# Altium PCB bt-kbd-v3a.PcbDoc
Units mm, origin at the board's own origin, x right, y up, seen from the top; angles counter-clockwise.
Board outline 62.3 x 51.2 mm, 2 copper layers (Top Layer, Bottom Layer), stack 0.98 mm thick; 57 components, 19 nets, 371 pads, 80 vias.
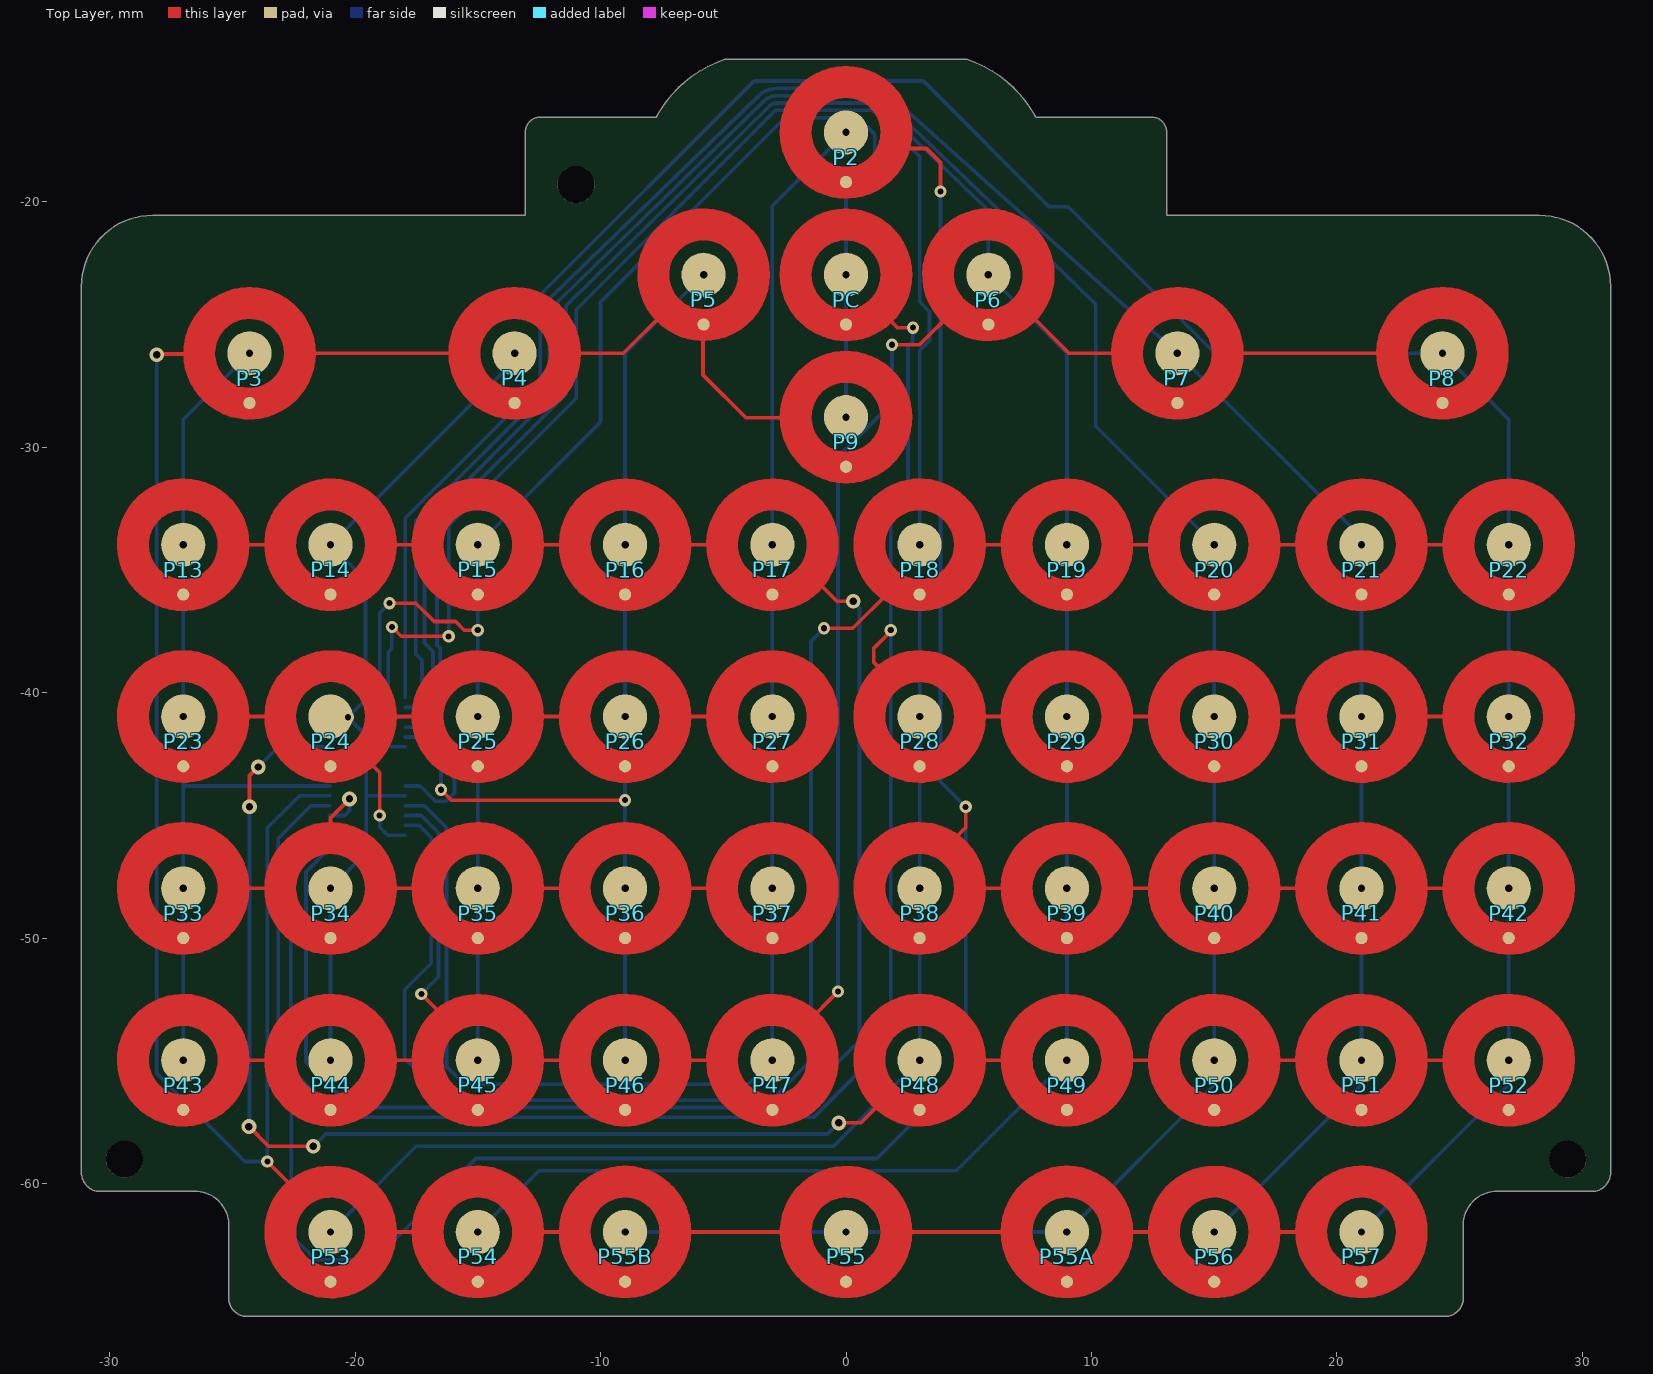
[diagram p0: Top Layer view]
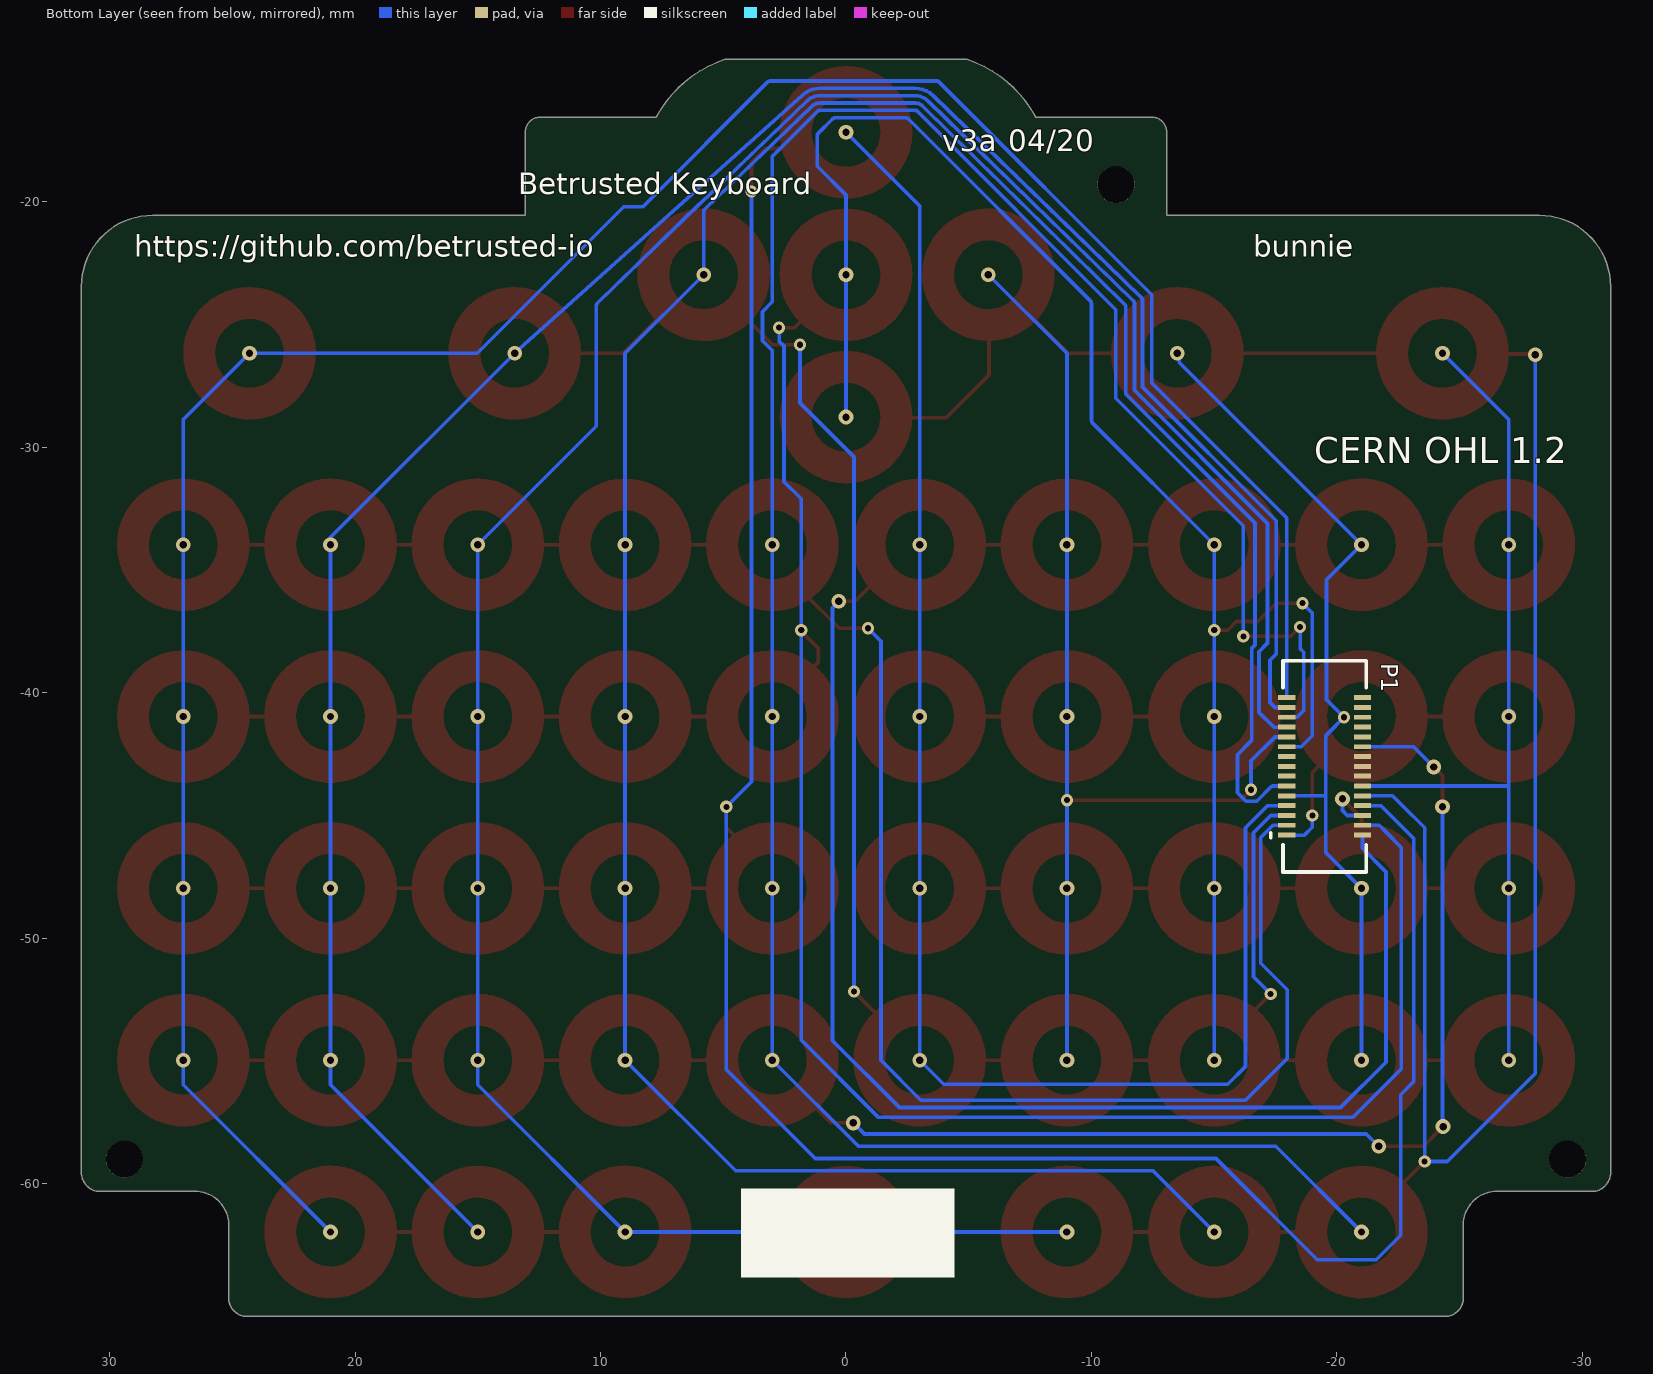
[diagram p1: Bottom Layer view, seen from below]

## Layer stack, top to bottom
Top Solder: solder mask 0.01, Solder Resist, Dk 3.5
Top Layer: signal copper 0.035
Dielectric 1: core 0.91, Core-042, Dk 4.6
Bottom Layer: signal copper 0.035
Bottom Solder: solder mask 0.01, Solder Resist, Dk 3.5

## Board outline
-26.55,-60.3 cw(c-26.55,-61.709) -25.15,-61.55 -25.15,-64.65 ccw(c-24.381,-64.65) -24.55,-65.4 24.55,-65.4 ccw(c24.381,-64.65) 25.15,-64.65 25.15,-61.55 cw(c26.55,-61.709) 26.55,-60.3 30.55,-60.3 ccw(c30.381,-59.55) 31.15,-59.55 31.15,-23.45 ccw(c28.25,-23.45) 28.25,-20.55 13.061,-20.55 13.061,-17.15 ccw(c12.461,-17.15) 12.461,-16.55 7.727,-16.55 ccw(c3.4,-18.85) 4.937,-14.197 -4.937,-14.197 ccw(c-3.4,-18.85) -7.727,-16.55 -12.461,-16.55 ccw(c-12.461,-17.15) -13.061,-17.15 -13.061,-20.55 -28.25,-20.55 ccw(c-28.25,-23.45) -31.15,-23.45 -31.15,-59.55 ccw(c-30.381,-59.55) -30.55,-60.3

## Design rules (kind name [scope] priority, off if disabled: settings)
Clearance [All] p1: gap=0.15 ignorepadtopadclearanceinfootprint=FALSE
MinimumSolderMaskSliver [All] p1 off: minsoldermaskwidth=0.254
PolygonConnect [All] p1: connectstyle=Relief reliefconductorwidth=0.254 reliefentries=4 polygonreliefangle="90 Angle" airgapwidth=0.254
RoomDefinition kbd [InComponentClass('kbd')] p1 off: confinementstyle=ConfineIn formatcopy=TRUE lockcomponents=FALSE outline 31.498,-61.146 36.098,-61.146 36.098,-49.446 31.498,-49.446
RoutingVias [All] p1: holewidth=0.4 width=0.8 viastyle="Through Hole" minholewidth=0.25 minwidth=0.5 maxholewidth=0.4 maxwidth=0.8
SilkToSilkClearance [All] p1 off: silktosilkclearance=0.254
SilkToSolderMaskClearance [IsPad] p1 off: minsilkscreentomaskgap=0.254 clearancetoexposedcopper=TRUE
SolderMaskExpansion [All] p1 off: expansion=0.102 istentingtop=FALSE
Width [All] p1: maxlimit=5 minlimit=0.15 preferedwidth=0.2
27 further rules are at their usual default settings.

## Components (designator, comment, footprint, x,y, rotation, side; value= is the part's Value field where it differs from the comment)
P1 "DF40HC(3.0)-30DS-0.4V(51)" HRS_DF40HC(3.0)-30DS-0.4V(51) -19.5,-43 r270 bottom
P2 "4mm Dome" 4MM_DOME_SW#1 0,-17.17 r0 top
P3 "4mm Dome" 4MM_DOME_SW#1 -24.3,-26.17 r0 top
P4 "4mm Dome" 4MM_DOME_SW#2 -13.5,-26.17 r0 top
P5 "4mm Dome" 4MM_DOME_SW#1 -5.8,-22.97 r0 top
P6 "4mm Dome" 4MM_DOME_SW#2 5.8,-22.97 r0 top
P7 "4mm Dome" 4MM_DOME_SW#1 13.5,-26.17 r0 top
P8 "4mm Dome" 4MM_DOME_SW#3 24.3,-26.17 r0 top
P9 "4mm Dome" 4MM_DOME_SW#1 0,-28.77 r0 top
P13 "4mm Dome" 4MM_DOME_SW#3 -27,-33.97 r0 top
P14 "4mm Dome" 4MM_DOME_SW#2 -21,-33.97 r0 top
P15 "4mm Dome" 4MM_DOME_SW#2 -15,-33.97 r0 top
P16 "4mm Dome" 4MM_DOME_SW#1 -9,-33.97 r0 top
P17 "4mm Dome" 4MM_DOME_SW#2 -3,-33.97 r0 top
P18 "4mm Dome" 4MM_DOME_SW#4 3,-33.97 r0 top
P19 "4mm Dome" 4MM_DOME_SW#1 9,-33.97 r0 top
P20 "4mm Dome" 4MM_DOME_SW#1 15,-33.97 r0 top
P21 "4mm Dome" 4MM_DOME_SW#1 21,-33.97 r0 top
P22 "4mm Dome" 4MM_DOME_SW#3 27,-33.97 r0 top
P23 "4mm Dome" 4MM_DOME_SW#3 -27,-40.97 r0 top
P24 "4mm Dome" 4MM_DOME_SW#2 -21,-40.97 r0 top
P25 "4mm Dome" 4MM_DOME_SW#2 -15,-40.97 r0 top
P26 "4mm Dome" 4MM_DOME_SW#1 -9,-40.97 r0 top
P27 "4mm Dome" 4MM_DOME_SW#1 -3,-40.97 r0 top
P28 "4mm Dome" 4MM_DOME_SW#1 3,-40.97 r0 top
P29 "4mm Dome" 4MM_DOME_SW#2 9,-40.97 r0 top
P30 "4mm Dome" 4MM_DOME_SW#2 15,-40.97 r0 top
P31 "4mm Dome" 4MM_DOME_SW#1 21,-40.97 r0 top
P32 "4mm Dome" 4MM_DOME_SW#1 27,-40.97 r0 top
P33 "4mm Dome" 4MM_DOME_SW#3 -27,-47.97 r0 top
P34 "4mm Dome" 4MM_DOME_SW#4 -21,-47.97 r0 top
P35 "4mm Dome" 4MM_DOME_SW#1 -15,-47.97 r0 top
P36 "4mm Dome" 4MM_DOME_SW#1 -9,-47.97 r0 top
P37 "4mm Dome" 4MM_DOME_SW#3 -3,-47.97 r0 top
P38 "4mm Dome" 4MM_DOME_SW#1 3,-47.97 r0 top
P39 "4mm Dome" 4MM_DOME_SW#1 9,-47.97 r0 top
P40 "4mm Dome" 4MM_DOME_SW#1 15,-47.97 r0 top
P41 "4mm Dome" 4MM_DOME_SW#1 21,-47.97 r0 top
P42 "4mm Dome" 4MM_DOME_SW#2 27,-47.97 r0 top
P43 "4mm Dome" 4MM_DOME_SW#3 -27,-54.97 r0 top
P44 "4mm Dome" 4MM_DOME_SW#2 -21,-54.97 r0 top
P45 "4mm Dome" 4MM_DOME_SW#2 -15,-54.97 r0 top
P46 "4mm Dome" 4MM_DOME_SW#2 -9,-54.97 r0 top
P47 "4mm Dome" 4MM_DOME_SW#1 -3,-54.97 r0 top
P48 "4mm Dome" 4MM_DOME_SW#1 3,-54.97 r0 top
P49 "4mm Dome" 4MM_DOME_SW#1 9,-54.97 r0 top
P50 "4mm Dome" 4MM_DOME_SW#1 15,-54.97 r0 top
P51 "4mm Dome" 4MM_DOME_SW#1 21,-54.97 r0 top
P52 "4mm Dome" 4MM_DOME_SW#1 27,-54.97 r0 top
P53 "4mm Dome" 4MM_DOME_SW#2 -21,-61.97 r0 top
P54 "4mm Dome" 4MM_DOME_SW#2 -15,-61.97 r0 top
P55 "4mm Dome" 4MM_DOME_SW#5 0,-61.97 r0 top
P55A "4mm Dome" 4MM_DOME_SW#2 9,-61.97 r0 top
P55B "4mm Dome" 4MM_DOME_SW#1 -9,-61.97 r0 top
P56 "4mm Dome" 4MM_DOME_SW#2 15,-61.97 r0 top
P57 "4mm Dome" 4MM_DOME_SW#3 21,-61.97 r0 top
PC "4mm Dome" 4MM_DOME_SW#2 0,-22.97 r0 top

## Footprints (in the part's own frame and the unit in brackets; to place one, negate y for a bottom-side part, rotate by r counter-clockwise, add the part's x,y. Pads: shape width x height; smd on the part's side, far side on the other; paste and mask are expansions set on the pad)
4MM_DOME_SW#1 [mm] "4mm diameter dome switch footprint"
  round 1.8 smd mask+2.1: 1(0,0)
  round 0.5 smd: 2(0,-2.025)
  Top Layer lines w1.3: -2.031,-0.277 ccw(c0,0) 1.718,-1.118 ccw(c0,0) 2.05,0 ccw(c0,0) -2.031,-0.277
  body extent -2,-2 2,2, height 0.3
4MM_DOME_SW#2 [mm] "4mm diameter dome switch footprint"
  round 1.8 smd mask+2.1: 1(0,0)
  round 0.5 smd: 2(0,-2.025)
  Top Layer lines w1.3: -2.05,0 cw(c0,0) 2.05,0 cw(c0,0) 0.319,-2.025 cw(c0,0) -0.319,-2.025 cw(c0,0) -2.05,0
  body extent -2,-2 2,2, height 0.3
4MM_DOME_SW#3 [mm] "4mm diameter dome switch footprint"
  round 1.8 smd mask+2.1: 1(0,0)
  round 0.5 smd: 2(0,-2.025)
  Top Layer lines w1.3: -0.319,-2.025 cw(c0,0) 2.05,0 cw(c0,0) -0.319,-2.025
  body extent -2,-2 2,2, height 0.3
4MM_DOME_SW#4 [mm] "4mm diameter dome switch footprint"
  round 1.8 smd mask+2.1: 1(0,0)
  round 0.5 smd: 2(0,-2.025)
  Top Layer lines w1.3: -1.592,1.292 ccw(c0,0) -1.269,-1.61 ccw(c0,0) -0.319,-2.025 ccw(c0,0) 0.319,-2.025 ccw(c0,0) 2.05,0 ccw(c0,0) -1.592,1.292
  body extent -2,-2 2,2, height 0.3
4MM_DOME_SW#5 [mm] "4mm diameter dome switch footprint"
  round 1.8 smd mask+2.1: 1(0,0)
  round 0.5 smd: 2(0,-2.025)
  Top Layer lines w1.3: -2.05,0 cw(c0,0) -2.048,0.098 cw(c0,0) -0.534,1.979 cw(c0,0) 2.05,0 cw(c0,0) 0.319,-2.025 cw(c0,0) -0.319,-2.025 cw(c0,0) -2.05,0
  body extent -2,-2 2,2, height 0.3
HRS_DF40HC(3.0)-30DS-0.4V(51) [mm] "0.4mm Pitch, Board to Board Connector, 3.0mm mated height"
  rect 0.2x0.7 smd mask+0.06: 1(2.8,-1.54) 2(2.4,-1.54) 3(2,-1.54) 4(1.6,-1.54) 5(1.2,-1.54) 6(0.8,-1.54) 7(0.4,-1.54) 8(0,-1.54) 9(-0.4,-1.54) 10(-0.8,-1.54) 11(-1.2,-1.54) 12(-1.6,-1.54) 13(-2,-1.54) 14(-2.4,-1.54) 15(-2.8,-1.54) 16(2.8,1.54) 17(2.4,1.54) 18(2,1.54) 19(1.6,1.54) 20(1.2,1.54) 21(0.8,1.54) 22(0.4,1.54) 23(0,1.54) 24(-0.4,1.54) 25(-0.8,1.54) 26(-1.2,1.54) 27(-1.6,1.54) 28(-2,1.54) 29(-2.4,1.54) 30(-2.8,1.54)
  silkscreen extent -4.3,-2.2 4.3,1.7, body extent -4.3,-1.69 4.3,1.69, height 2.89

## Part data
P1: library part "Header 15X2A", "Header, 15-Pin, Dual row", LatestRevisionDate=17-Jul-2002, LatestRevisionNote="Re-released for DXP Platform.", MPN=DF40HC(3.0)-30DS-0.4V(51), MYPN=J-DF40HC(3.0)-30DS-0.4V(51), Publisher="Altium Limited", System=Connector, VENDOR=Hirose
P2 P3 P4 P5 P6 P7 P8 P9 P13 P14 P15 P16 P17 P18 P19 P20 P21 P22 P23 P24 P25 P26 P27 P28 P29 P30 P31 P32 P33 P34 P35 P36 P37 P38 P39 P40 P41 P42 P43 P44 P45 P46 P47 P48 P49 P50 P51 P52 P53 P54 P55 P55A P55B P56 P57 PC: library part "Header 2", "Header, 2-Pin", LatestRevisionDate=17-Jul-2002, LatestRevisionNote="Re-released for DXP Platform.", Publisher="Altium Limited"

## Free pads (board coordinates)
  round 1.5 hole 1.5 unplated mask+0.5: 0(-29.4,-59) 0(-11,-19.3) 0(29.4,-59)
  rect 2.489x0.051 on Bottom Overlay: 1(-26.618,-26.192) 1(-26.618,-26.141) 1(-26.618,-26.243) 1(-24.332,-23.855)
  rect 2.54x0.051 on Bottom Overlay: 1(-26.593,-26.497) 1(-26.593,-26.395) 1(-26.593,-26.344) 1(-26.593,-26.294) 1(-26.593,-26.09) 1(-26.593,-25.989) 1(-26.593,-25.938) 1(-26.593,-26.446) 1(-26.593,-26.04) 1(-26.593,-25.887) 1(-26.491,-25.684) 1(-22.173,-25.684) 1(-22.072,-26.446) 1(-22.072,-26.395) 1(-22.072,-26.344) 1(-22.072,-26.294) 1(-22.072,-26.243) 1(-22.072,-26.192) 1(-22.072,-26.141) 1(-22.072,-26.09) 1(-22.072,-26.04) 1(-22.072,-25.989) 1(-22.072,-25.938) 1(-22.072,-25.887)
  rect 2.591x0.051 on Bottom Overlay: 1(-26.568,-26.598) 1(-26.568,-26.548) 1(-26.568,-25.836) 1(-26.568,-25.786) 1(-26.568,-25.735) 1(-26.517,-26.649) 1(-22.148,-26.649) 1(-22.097,-26.548) 1(-22.097,-26.497) 1(-22.097,-25.786) 1(-22.097,-26.598) 1(-22.097,-25.836)
  rect 0.102x0.051 on Bottom Overlay: 1(-26.491,-23.398) 1(-25.425,-28.63) 1(-23.24,-28.63) 1(-22.173,-23.398)
  rect 0.254x0.051 on Bottom Overlay: 1(-26.466,-28.884) 1(-26.466,-23.449) 1(-25.45,-28.58) 1(-23.215,-28.58) 1(-22.199,-28.884) 1(-22.199,-23.449)
  rect 0.356x0.051 on Bottom Overlay: 1(-26.466,-28.834) 1(-26.466,-23.5) 1(-25.501,-28.529) 1(-23.164,-28.529) 1(-22.199,-23.5)
  rect 0.152x0.051 on Bottom Overlay: 1(-26.466,-28.935) 1(-22.199,-28.935)
  rect 0.457x0.051 on Bottom Overlay: 1(-26.466,-23.55)
  rect 0.508x0.051 on Bottom Overlay: 1(-26.441,-28.783) 1(-22.224,-28.783) 1(-22.224,-23.55)
  rect 0.61x0.051 on Bottom Overlay: 1(-26.441,-28.732) 1(-26.441,-23.601) 1(-22.224,-23.601)
  rect 0.711x0.051 on Bottom Overlay: 1(-26.441,-23.652)
  rect 0.864x0.051 on Bottom Overlay: 1(-26.415,-28.63) 1(-26.415,-23.703) 1(-24.332,-22.636) 1(-22.25,-28.63) 1(-22.25,-23.703)
  rect 0.965x0.051 on Bottom Overlay: 1(-26.415,-23.754) 1(-24.332,-22.788) 1(-24.332,-22.738) 1(-24.332,-22.687) 1(-22.25,-23.754)
  rect 0.762x0.051 on Bottom Overlay: 1(-26.415,-28.681) 1(-22.25,-28.681) 1(-22.25,-23.652)
  rect 1.016x0.051 on Bottom Overlay: 1(-26.39,-28.58) 1(-24.358,-22.839) 1(-22.275,-28.58)
  rect 2.337x0.051 on Bottom Overlay: 1(-26.39,-26.7) 1(-25.628,-25.176) 1(-22.275,-26.7)
  rect 1.219x0.051 on Bottom Overlay: 1(-26.39,-23.855) 1(-24.358,-23.398) 1(-22.275,-23.855)
  rect 1.118x0.051 on Bottom Overlay: 1(-26.39,-23.804) 1(-26.39,-28.529) 1(-24.358,-23.144) 1(-22.275,-28.529) 1(-22.275,-23.804)
  rect 2.286x0.051 on Bottom Overlay: 1(-26.364,-25.633) 1(-23.062,-25.176) 1(-22.351,-25.633)
  rect 2.134x0.051 on Bottom Overlay: 1(-26.237,-26.751) 1(-25.729,-25.227) 1(-22.935,-25.227) 1(-22.427,-26.751)
  rect 1.829x0.051 on Bottom Overlay: 1(-26.187,-28.376) 1(-26.085,-28.122) 1(-26.034,-28.021) 1(-26.034,-26.852) 1(-26.034,-25.532) 1(-25.983,-26.903) 1(-25.983,-25.481) 1(-25.78,-27.462) 1(-25.78,-27.411) 1(-22.885,-27.462) 1(-22.885,-27.411) 1(-22.732,-25.43) 1(-22.681,-27.97) 1(-22.681,-26.903) 1(-22.681,-26.852) 1(-22.681,-25.481) 1(-22.631,-28.072) 1(-22.631,-28.021) 1(-22.631,-25.532) 1(-22.58,-28.122) 1(-22.478,-28.376)
  rect 1.93x0.051 on Bottom Overlay: 1(-26.187,-28.326) 1(-25.882,-27.005) 1(-25.882,-25.328) 1(-25.78,-27.31) 1(-25.78,-27.259) 1(-22.885,-27.31) 1(-22.885,-27.259) 1(-22.783,-27.005) 1(-22.783,-25.328) 1(-22.732,-26.954) 1(-22.478,-28.326)
  rect 2.032x0.051 on Bottom Overlay: 1(-26.187,-25.582) 1(-25.831,-27.106) 1(-25.78,-27.208) 1(-25.78,-27.157) 1(-22.885,-27.208) 1(-22.885,-27.157) 1(-22.885,-27.106) 1(-22.478,-25.582)
  rect 1.676x0.051 on Bottom Overlay: 1(-26.161,-28.478) 1(-25.806,-27.614)
  rect 1.778x0.051 on Bottom Overlay: 1(-26.161,-28.427) 1(-26.009,-27.97) 1(-25.958,-27.919) 1(-25.958,-27.868) 1(-25.907,-27.818) 1(-25.856,-27.716) 1(-22.808,-27.716) 1(-22.758,-27.818) 1(-22.707,-27.919) 1(-22.707,-27.868) 1(-22.504,-28.427)
  rect 1.88x0.051 on Bottom Overlay: 1(-26.161,-28.275) 1(-26.161,-28.224) 1(-26.11,-28.173) 1(-26.06,-28.072) 1(-26.06,-26.802) 1(-25.958,-26.954) 1(-25.958,-25.43) 1(-25.907,-25.379) 1(-25.806,-27.36) 1(-22.91,-27.36) 1(-22.758,-25.379) 1(-22.605,-26.802) 1(-22.554,-28.224) 1(-22.554,-28.173) 1(-22.504,-28.275)
  rect 1.727x0.051 on Bottom Overlay: 1(-25.882,-27.767) 1(-25.831,-27.665) 1(-25.78,-27.564) 1(-25.78,-27.513) 1(-24.358,-23.703) 1(-22.885,-27.614) 1(-22.885,-27.564) 1(-22.885,-27.513) 1(-22.834,-27.665) 1(-22.783,-27.767) 1(-22.529,-28.478)
  rect 1.981x0.051 on Bottom Overlay: 1(-25.856,-27.056) 1(-25.806,-25.278) 1(-24.332,-23.754) 1(-22.859,-25.278) 1(-22.808,-27.056)
  rect 4.674x0.051 on Bottom Overlay: 1(-24.358,-24.719)
  rect 5.08x0.051 on Bottom Overlay: 1(-24.358,-24.414)
  rect 4.877x0.051 on Bottom Overlay: 1(-24.358,-24.566)
  rect 4.826x0.051 on Bottom Overlay: 1(-24.332,-25.125) 1(-24.332,-25.074) 1(-24.332,-24.617)
  rect 4.724x0.051 on Bottom Overlay: 1(-24.332,-25.024) 1(-24.332,-24.668) 1(-24.332,-24.973)
  rect 4.623x0.051 on Bottom Overlay: 1(-24.332,-24.871) 1(-24.332,-24.82) 1(-24.332,-24.77) 1(-24.332,-24.922)
  rect 5.029x0.051 on Bottom Overlay: 1(-24.332,-24.465)
  rect 5.131x0.051 on Bottom Overlay: 1(-24.332,-24.363)
  rect 5.232x0.051 on Bottom Overlay: 1(-24.332,-24.312)
  rect 5.334x0.051 on Bottom Overlay: 1(-24.332,-24.262) 1(-24.332,-24.211)
  rect 5.537x0.051 on Bottom Overlay: 1(-24.332,-24.109) 1(-24.332,-24.058) 1(-24.332,-23.957)
  rect 5.639x0.051 on Bottom Overlay: 1(-24.332,-24.008)
  rect 5.436x0.051 on Bottom Overlay: 1(-24.332,-23.906) 1(-24.332,-24.16)
  rect 1.473x0.051 on Bottom Overlay: 1(-24.332,-23.652)
  rect 1.27x0.051 on Bottom Overlay: 1(-24.332,-23.601) 1(-24.332,-23.55) 1(-24.332,-23.5) 1(-24.332,-23.449)
  rect 1.168x0.051 on Bottom Overlay: 1(-24.332,-23.347) 1(-24.332,-23.296) 1(-24.332,-23.246) 1(-24.332,-23.195)
  rect 1.067x0.051 on Bottom Overlay: 1(-24.332,-22.992) 1(-24.332,-22.941) 1(-24.332,-22.89) 1(-24.332,-23.093) 1(-24.332,-23.042)
  rect 4.928x0.051 on Bottom Overlay: 1(-24.332,-24.516)
  rect 2.184x0.051 on Bottom Overlay: 1(-24.332,-23.804)
  rect 0.66x0.051 on Bottom Overlay: 1(-22.25,-28.732)
  rect 0.406x0.051 on Bottom Overlay: 1(-22.224,-28.834)
  rect 2.642x0.051 on Bottom Overlay: 1(-22.123,-25.735)

## Via types
v1: diameter 0.6, hole 0.3, Top Layer to Bottom Layer, tented both sides, 63 vias
v2: diameter 0.5, hole 0.25, Top Layer to Bottom Layer, tented both sides, 17 vias

## Nets (pads, with @x,y where several pads share a name; then routed paths per layer and width w, separated by ;. In a path a pad name is that pad's centre, name@x,y a point inside that pad or via, vN(x,y) a via of type N, cw(c..) or ccw(c..) an arc to the next point about the centre after c; other vN are vias at no path point)
KEY0: P1.16 P13.2 P14.2 P15.2 P16.2 P17.2 | length 61.7
  Top Layer w0.15: -24.95,-33.97 -23.138,-33.97 -23.048,-34.06 ; -18.95,-33.97 -17.148,-33.97 -17.048,-33.87 ; -12.95,-33.97 -11.148,-33.97 ; -6.95,-33.97 -5.148,-33.97 ; -1.397,-35.248 -0.37,-36.275 v1(0.3,-36.275)
  Bottom Layer w0.15: P1.16 -21.04,-46.34 -22,-47.3 -22,-55.05 -20.15,-56.9 -2.175,-56.9 0.55,-54.175 0.55,-36.55 v1@0.288,-36.287
KEY1: P1.1 P23.2 P24.2 P25.2 P26.2 P27.2 | length 11.6
  Top Layer w0.15: -24.95,-40.97 -23.148,-40.97 ; -19.699,-42.555 -19,-43.254 v2(-19,-45) ; -18.95,-40.97 -17.148,-40.97 ; -12.95,-40.97 -11.148,-40.97 ; -6.95,-40.97 -5.148,-40.97
  Bottom Layer w0.15: v2(-19,-45) -19,-45.475 -18.675,-45.8 P1.1
KEY2: P1.18 P33.2 P34.2 P35.2 P36.2 P37.2 | length 10.5
  Top Layer w0.15: -24.95,-47.97 -23.148,-47.97 ; -21,-45.92 -21,-45.1 v1(-20.225,-44.325) ; -18.95,-47.97 -17.148,-47.97 ; -12.95,-47.97 -11.148,-47.97 ; -6.95,-47.97 -5.148,-47.97
  Bottom Layer w0.15: P1.18 -20.425,-45 -20.225,-44.8 v1(-20.225,-44.325)
KEY3: P1.3 P6.2 P7.2 P8.2 P43.2 P44.2 P45.2 P46.2 P47.2 | length 61
  Top Layer w0.15: -24.95,-54.97 -23.148,-54.97 ; -18.95,-54.97 -17.148,-54.97 ; v2(-17.3,-52.275) -16.347,-53.228 -16.347,-53.425 ; -12.95,-54.97 -11.148,-54.97 ; -6.95,-54.97 -5.148,-54.97 ; -1.675,-53.525 -1.612,-53.462 v2(-0.325,-52.175) ; v2(1.875,-25.825) 2.996,-25.825 4.376,-24.445 ; 7.325,-24.4 9.1,-26.175 11.425,-26.175 ; 15.55,-26.17 22.225,-26.17
  Bottom Layer w0.15: P1.3 -17.3,-45 -16.6,-45.7 -16.6,-51.575 v2(-17.3,-52.275) ; v2(-0.325,-52.175) -0.325,-30.4 1.875,-28.2 v2(1.875,-25.825)
KEY4: P1.2 P18.2 P19.2 P20.2 P21.2 P22.2 | length 57.2
  Top Layer w0.15: v2(-0.9,-37.375) 0.213,-37.375 ccw(c0.213,-37.225) 0.319,-37.331 1.686,-35.964 ccw(c1.581,-35.857) 1.731,-35.857 1.731,-35.58 ; 5.05,-33.97 6.852,-33.97 ; 11.05,-33.97 12.852,-33.97 ; 17.05,-33.97 18.852,-33.97 ; 23.05,-33.97 24.852,-33.97
  Bottom Layer w0.15: P1.2 -17.4,-45.4 -16.9,-45.9 -16.9,-51.025 -17.975,-52.1 -17.975,-54.9 -16.275,-56.6 -3.05,-56.6 -1.425,-54.975 -1.425,-37.9 v2(-0.9,-37.375)
KEY5: P1.17 P28.2 P29.2 P30.2 P31.2 P32.2 PC.2 | length 78.5
  Top Layer w0.15: 1.2,-24.225 1.422,-24.447 2.1,-25.125 v2@2.675,-25.125 ; 1.735,-39.357 1.125,-38.747 1.125,-38.2 1.825,-37.5 v2(1.825,-37.45) ; 5.05,-40.97 6.852,-40.97 ; 11.05,-40.97 12.852,-40.97 ; 17.05,-40.97 18.852,-40.97 ; 23.05,-40.97 24.852,-40.97
  Bottom Layer w0.15: P1.17 -21.59,-45.4 -21.725,-45.4 -22,-45.675 -22.625,-46.3 -22.625,-55.325 -20.65,-57.3 -1.325,-57.3 1.825,-54.15 v2(1.825,-37.45) 1.825,-32.1 2.525,-31.4 2.525,-25.875 2.725,-25.675 v2(2.725,-25.125)
KEY6: P1.19 P2.2 P38.2 P39.2 P40.2 P41.2 P42.2 | length 98.7
  Top Layer w0.15: 1.975,-17.825 3.275,-17.825 3.85,-18.4 v2(3.85,-19.575) ; 4.115,-46.25 4.875,-45.489 v2(4.875,-44.65) ; 5.05,-47.97 6.852,-47.97 ; 11.05,-47.97 12.852,-47.97 ; 17.05,-47.97 18.852,-47.97 ; 23.05,-47.97 24.852,-47.97
  Bottom Layer w0.15: P1.19 -21.8,-44.6 -23.125,-45.925 -23.125,-55.85 -22.6,-56.375 -22.6,-62.1 -21.6,-63.1 -19.2,-63.1 -15.075,-58.975 1.25,-58.975 4.875,-55.35 v2(4.875,-44.65) 3.85,-43.625 v2(3.85,-19.575)
KEY7: P1.25 P48.2 P49.2 P50.2 P51.2 P52.2 | length 52.3
  Top Layer w0.15: v1(-24.325,-57.675) -23.525,-58.475 v1(-21.7,-58.475) ; v1(-24.3,-44.65) -24.3,-43.375 v1(-23.95,-43.025) ; v1(-0.3,-57.525) 0.6,-57.525 1.55,-56.575 ; 5.05,-54.97 6.852,-54.97 ; 11.05,-54.97 12.852,-54.97 ; 17.05,-54.97 18.852,-54.97 ; 23.05,-54.97 24.852,-54.97
  Bottom Layer w0.15: v1(-24.325,-57.675) -24.3,-57.65 v1(-24.3,-44.65) ; v1(-23.95,-43.025) -23.125,-42.2 P1.25 ; v1(-21.7,-58.475) -21.2,-57.975 -0.75,-57.975 v1(-0.3,-57.525)
KEY8: P1.20 P3.2 P4.2 P5.2 P9.2 P53.2 P54.2 P55.2 P55A.2 P55B.2 P56.2 P57.2 | length 91.1
  Top Layer w0.15: v1(-28.075,-26.225) -28.047,-26.197 -26.35,-26.197 ; v2(-23.575,-59.1) -22.295,-60.38 -22.225,-60.45 ; -22.25,-26.17 -15.55,-26.17 -15.35,-26.17 ; -18.95,-61.97 -17.148,-61.97 ; -12.95,-61.97 -11.148,-61.97 ; -11.45,-26.17 -9.07,-26.17 -7.284,-24.384 -7.225,-24.325 ; -6.95,-61.97 -2.05,-61.97 -2.048,-61.97 ; P5.2@-5.825,-25.02 -5.825,-27.05 -4.075,-28.8 -2.075,-28.8 ; 2.05,-61.97 6.95,-61.97 7.075,-61.97 ; 11.05,-61.97 12.852,-61.97 ; 17.05,-61.97 18.852,-61.97
  Bottom Layer w0.15: v1(-28.075,-26.225) -28.075,-55.525 -24.5,-59.1 v2(-23.575,-59.1) -23.575,-45.5 -22.675,-44.6 -22.319,-44.244 cw(c-22.213,-44.35) -22.214,-44.2 ; -22.213,-44.2 P1.20
KEY9: P1.21 P3.1 P13.1 P23.1 P33.1 P43.1 | length 35.9
  Bottom Layer w0.15: v1(-27,-54.97) v1(-27,-47.97) -27,-43.825 ; v1(-24.3,-26.17) -27,-28.87 v1(-27,-33.97) v1(-27,-40.97) -27,-43.825 ; P1.21 -26.975,-43.8 -27,-43.825
KEY10: P1.5 P4.1 P14.1 P24.1 P34.1 P44.1 | length 35.3
  Bottom Layer w0.15: v1(-21,-54.97) v1(-21,-47.97) -19.594,-46.564 ccw(c-19.7,-46.458) -19.55,-46.458 -19.55,-44.2 ; P1.5 -19.55,-44.2 ; v1(-13.5,-26.17) -13.577,-26.247 -13.577,-26.547 v1(-21,-33.97) -19.575,-35.395 -19.575,-40.285 v2(-20.29,-41) -19.594,-41.696 cw(c-19.7,-41.802) -19.55,-41.802 -19.55,-44.2
KEY11: P1.10 P9.1 P15.1 P25.1 P35.1 P45.1 PC.1 | length 70.3
  Top Layer w0.15: v2(-18.6,-36.35) -17.525,-36.35 -16.775,-37.1 -15.9,-37.1 -15.55,-37.45 v2(-15,-37.45)
  Bottom Layer w0.15: v2(-18.6,-36.35) -19,-36.75 -19,-41.75 -18.55,-42.2 P1.10 ; v1(-15,-54.97) v1(-15,-47.97) v1(-15,-40.97) v1(-15,-33.97) -10.059,-29.029 ccw(c-10.2,-28.887) -10,-28.887 -10,-24.158 cw(c-9.8,-24.158) -9.941,-24.016 -2.559,-16.634 cw(c-2.417,-16.775) -2.417,-16.575 0.417,-16.575 cw(c0.417,-16.775) 0.558,-16.633 1.116,-17.191 ; v1(0,-28.77) v1(0,-22.97) 0,-19.725 1.175,-18.55 1.175,-17.334 1.175,-17.331 ccw(c0.975,-17.333) 1.145,-17.228 ccw(c0.974,-17.332) 1.116,-17.191
KEY12: P1.11 P5.1 P16.1 P26.1 P36.1 P46.1 | length 44
  Top Layer w0.15: v2(-16.5,-43.95) -16.075,-44.375 v2(-9,-44.375)
  Bottom Layer w0.15: P1.11 -17.475,-41.8 -16.5,-42.775 v2(-16.5,-43.95) ; v1(-9,-54.97) v1(-9,-47.97) v1(-9,-40.97) v1(-9,-33.97) -9,-26.17 v1(-5.8,-22.97)
KEY13: P1.4 P2.1 P17.1 P27.1 P37.1 P47.1 | length 64.8
  Bottom Layer w0.15: P1.4 -17.175,-44.6 -16.275,-45.5 -16.275,-55.225 -15.55,-55.95 -3.98,-55.95 v1(-3,-54.97) v1(-3,-47.97) v1(-3,-40.97) v1(-3,-33.97) -3,-20.17 v1(0,-17.17)
KEY14: P1.13 P18.1 P28.1 P38.1 P48.1 P53.1 | length 104.4
  Top Layer w0.15: v2(-18.5,-37.325) -18.122,-37.703 v2(-16.189,-37.703)
  Bottom Layer w0.15: v1(-21,-61.97) -17.505,-58.475 -0.505,-58.475 v1(3,-54.97) v1(3,-47.97) v1(3,-40.97) v1(3,-33.97) 3,-26.06 3.4,-25.66 3.4,-24.475 3,-24.075 3,-18.15 1.169,-16.319 ccw(c1.063,-16.425) 1.063,-16.275 -2.813,-16.275 ccw(c-2.813,-16.425) -2.919,-16.319 -10.993,-24.393 -10.993,-28.006 -16.189,-33.201 v2(-16.189,-37.703) ; v2(-18.5,-37.325) -18.5,-38.2 -18.65,-38.35 -18.65,-40.725 -18.375,-41 P1.13
KEY15: P1.6 P6.1 P19.1 P29.1 P39.1 P49.1 P54.1 | length 109.9
  Bottom Layer w0.15: P1.6 -17.413,-43.8 cw(c-17.413,-43.95) -17.307,-43.844 -16.77,-44.381 ccw(c-16.664,-44.275) -16.664,-44.425 -16.3,-44.425 -15.95,-44.075 -15.95,-42.525 -16.525,-41.95 -16.525,-38.197 -16.664,-38.058 -16.664,-33.089 -11.4,-27.825 -11.4,-24.287 cw(c-11.25,-24.287) -11.355,-24.18 -3.129,-16.105 cw(c-2.813,-16.425) -2.813,-15.975 1.063,-15.975 cw(c1.063,-16.425) 1.375,-16.101 5.753,-20.305 cw(c5.65,-20.413) 5.8,-20.412 ; v1(-15,-61.97) -12.505,-59.475 4.495,-59.475 v1(9,-54.97) v1(9,-47.97) v1(9,-40.97) v1(9,-33.97) 9,-26.17 v1(5.8,-22.97) 5.8,-20.412
KEY16: P1.12 P20.1 P30.1 P40.1 P50.1 P55.1 P55A.1 P55B.1 | length 109.5
  Bottom Layer w0.15: P1.12 -17.425,-41.4 -16.825,-40.8 -16.825,-38.325 -17.175,-37.975 -17.175,-33.1 -11.754,-27.679 -11.754,-24.141 cw(c-11.604,-24.141) -11.708,-24.033 -3.337,-15.889 cw(c-2.813,-16.425) -2.813,-15.675 1.063,-15.675 cw(c1.063,-16.425) 1.584,-15.886 5.961,-20.088 cw(c5.65,-20.413) 5.964,-20.091 10.129,-24.13 cw(c10.025,-24.238) 10.175,-24.237 10.175,-29.145 v1(15,-33.97) v1(15,-40.97) v1(15,-47.97) v1(15,-54.97) 15,-55.97 v1(9,-61.97) v1(0,-61.97) v1(-9,-61.97)
KEY17: P1.14 P7.1 P21.1 P31.1 P41.1 P51.1 P56.1 | length 94.1
  Bottom Layer w0.15: P1.14 -17.475,-40.6 -17.275,-40.4 -17.275,-38.675 -17.525,-38.425 -17.525,-32.99 -12.079,-27.544 -12.079,-24.006 cw(c-11.929,-24.006) -12.033,-23.898 ; -12.033,-23.898 -3.544,-15.671 cw(c-2.813,-16.425) -2.813,-15.375 1.063,-15.375 cw(c1.063,-16.425) 1.765,-15.645 13.495,-26.165 cw(c13.395,-26.277) v1(13.5,-26.17) v1(13.5,-26.17) 21,-33.67 v1(21,-33.97) v1(21,-40.97) v1(21,-47.97) v1(21,-54.97) 21,-55.97 v1(15,-61.97)
KEY18: P1.15 P8.1 P22.1 P32.1 P42.1 P52.1 P57.1 | length 103
  Bottom Layer w0.15: P1.15 -17.96,-32.885 -12.461,-27.386 -12.461,-23.786 -3.794,-15.119 cw(c-3.688,-15.225) -3.688,-15.075 3.088,-15.075 cw(c3.088,-15.225) 3.194,-15.119 8.275,-20.2 9.05,-20.2 15.02,-26.17 v1(24.3,-26.17) 27,-28.87 v1(27,-33.97) v1(27,-40.97) v1(27,-47.97) v1(27,-54.97) 27,-55.97 v1(21,-61.97)
pads on no net: P1.7 P1.8 P1.9 P1.22 P1.23 P1.24 P1.26 P1.27 P1.28 P1.29 P1.30

## Silkscreen, mask and mechanical layers (free items; w line width, h text height)
Bottom Overlay:
  region: 4.275,-63.825 4.275,-60.2 -4.425,-60.2 -4.425,-63.825
  text "04/20" at -6.6,-18.225 h1.5
  text "v3a" at -3.925,-18.225 h1.5
  text "Betrusted Keyboard" at 13.35,-19.975 h1.5
  text "bunnie" at -16.6,-22.525 h1.5
  text "https://github.com/betrusted-io" at 29,-22.525 h1.5
  text "CERN OHL 1.2" at -19.07,-31.004 h1.8
Mechanical 1:
  circle w0.1: c29.4,-59 r0.75
  circle w0.1: c-29.4,-59 r0.75
  circle w0.1: c-11,-19.3 r0.75
  lines w0.1: -31.15,-59.55 ccw(c-30.381,-59.55) -30.55,-60.3 -26.55,-60.3 cw(c-26.55,-61.709) -25.15,-61.55 -25.15,-64.65 ccw(c-24.381,-64.65) -24.55,-65.4 24.55,-65.4 ccw(c24.381,-64.65) 25.15,-64.65 25.15,-61.55 cw(c26.55,-61.709) 26.55,-60.3 30.55,-60.3 ccw(c30.381,-59.55) 31.15,-59.55 31.15,-23.45 ccw(c28.25,-23.45) 28.25,-20.55 13.061,-20.55 13.061,-17.15 ccw(c12.461,-17.15) 12.461,-16.55 7.727,-16.55 ccw(c3.4,-18.85) 4.937,-14.197 -4.937,-14.197 ccw(c-3.4,-18.85) -7.727,-16.55 -12.461,-16.55 ccw(c-12.461,-17.15) -13.061,-17.15 -13.061,-20.55 -28.25,-20.55 ccw(c-28.25,-23.45) -31.15,-23.45 -31.15,-59.55
Mechanical 3 (Mech3):
  drawing of 165 lines, arcs and shapes, not listed
  text "Layer" at 38.366,-0.046 h1.52
  text "Name" at 48.778,-0.046 h1.52
  text "Material" at 72.394,-0.046 h1.52
  text "Thickness" at 94.232,-0.046 h1.52
  text "Constant" at 110.737,-0.046 h1.52
  text "Board Layer Stack" at 125.212,-0.046 h1.52
  text "Top Solder" at 48.778,-3.094 h1.52
  text "Solder Resist" at 72.394,-3.094 h1.52
  text "0.010mm" at 94.232,-3.094 h1.52
  text "3.5" at 110.737,-3.094 h1.52
  text "1" at 38.366,-6.142 h1.52
  text "Top Layer" at 48.778,-6.142 h1.52
  text "Copper" at 72.394,-6.142 h1.52
  text "0.035mm" at 94.232,-6.142 h1.52
  text "Dielectric 1" at 48.778,-9.19 h1.52
  text "Core-042" at 72.394,-9.19 h1.52
  text "0.910mm" at 94.232,-9.19 h1.52
  text "4.6" at 110.737,-9.19 h1.52
  text "2" at 38.366,-12.238 h1.52
  text "Bottom Layer" at 48.778,-12.238 h1.52
  text "Copper" at 72.394,-12.238 h1.52
  text "0.035mm" at 94.232,-12.238 h1.52
  text "Bottom Solder" at 48.778,-15.286 h1.52
  text "Solder Resist" at 72.394,-15.286 h1.52
  text "0.010mm" at 94.232,-15.286 h1.52
  text "3.5" at 110.737,-15.286 h1.52
  text "Bottom Overlay" at 48.778,-18.334 h1.52
  text "Total board thickness:" at 38.366,-21.382 h1.52
  text "1.000mm" at 94.232,-21.382 h1.52
  text "Finish -- immersion gold" at 38.4,-25.5 h1
  text "Solder mask clear (transparent) / silkscreen white" at 38.475,-29.525 h1